# Altium PCB doorCard.PcbDoc
Units mm, origin at the board's own origin, x right, y up, seen from the top; angles counter-clockwise.
Board outline 100 x 45 mm, 2 copper layers (Top Layer, Bottom Layer); 39 components, 27 nets, 123 pads, 189 vias.
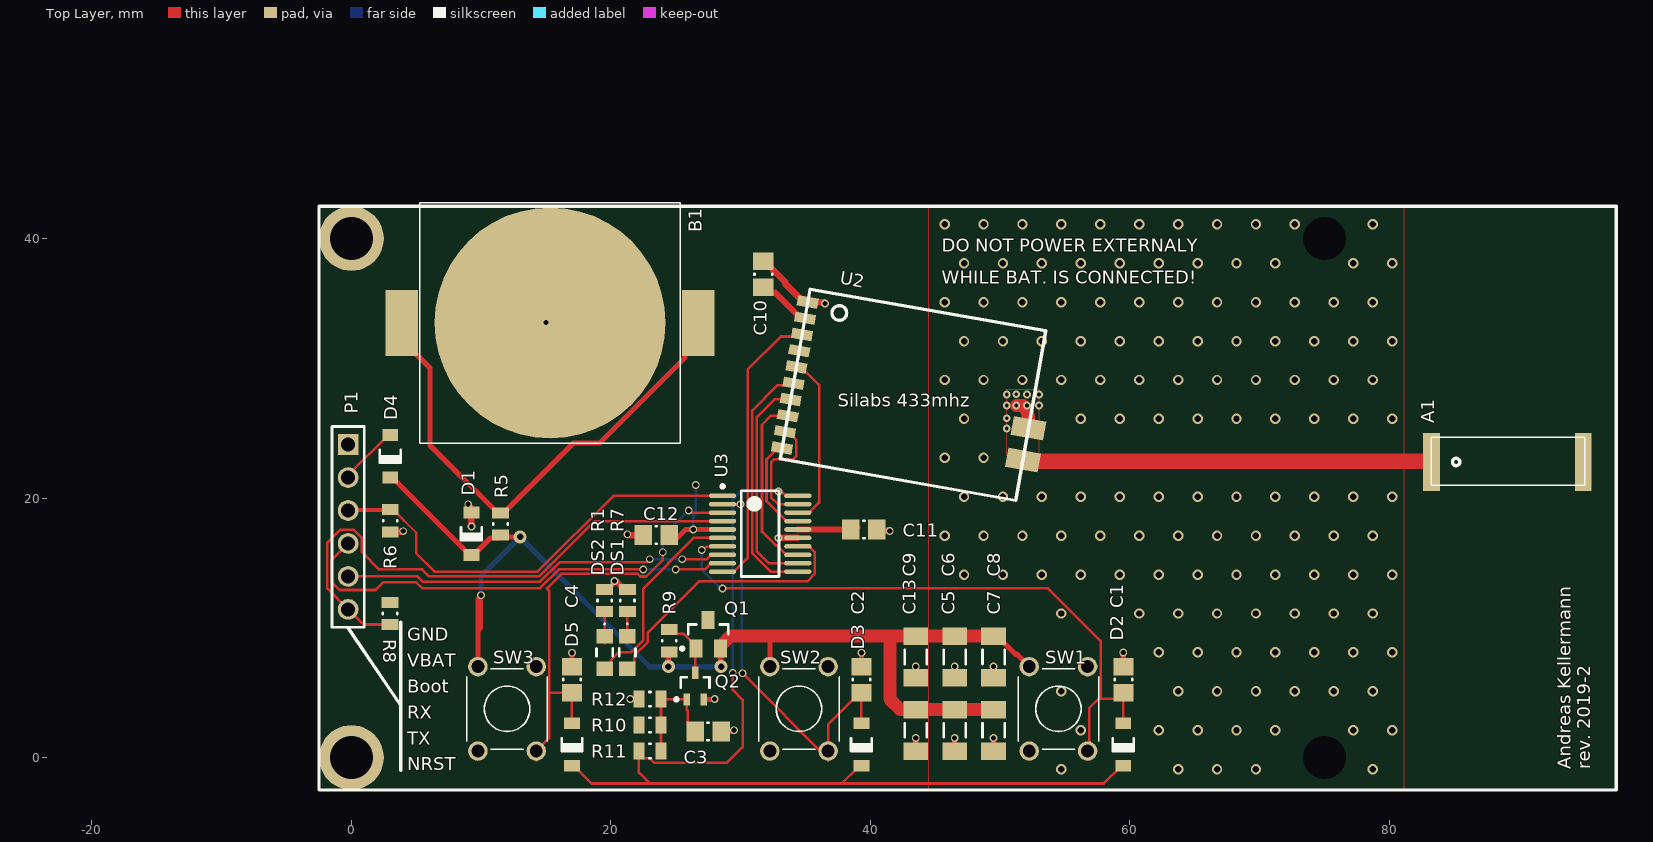
[diagram p0: Top Layer view]
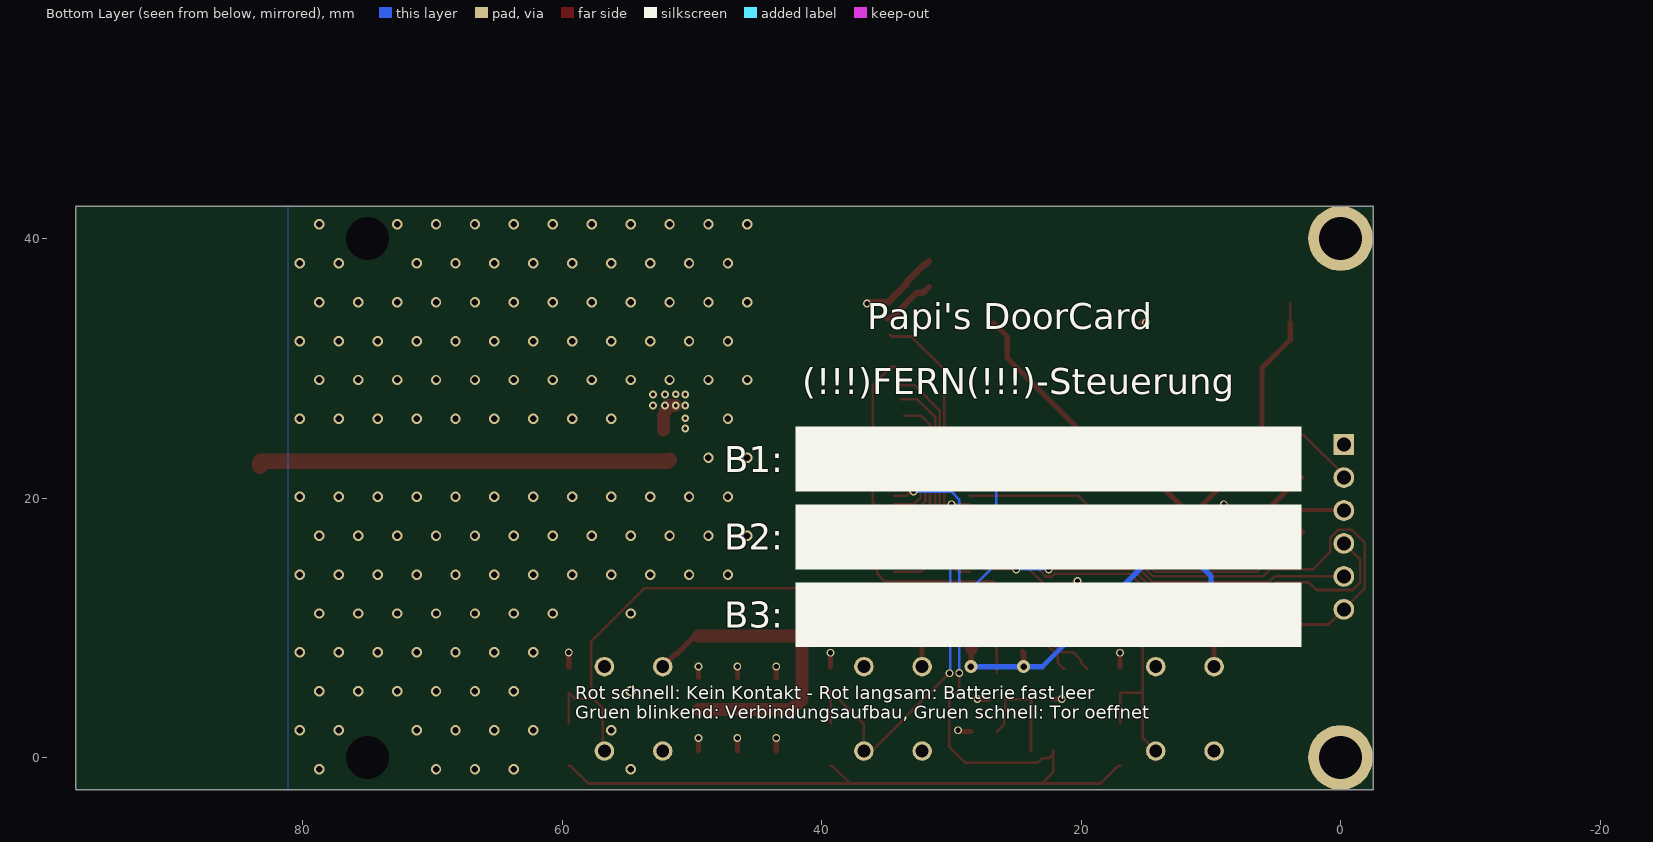
[diagram p1: Bottom Layer view, seen from below]

## Layer stack, top to bottom
Top Solder: solder mask 0.0102, Solder Resist, Dk 3.5
Top Layer: signal copper 0.0356
Dielectric 1: dielectric 0.32, FR-4, Dk 4.8
Bottom Layer: signal copper 0.0356
Bottom Solder: solder mask 0.0102, Solder Resist, Dk 3.5

## Board outline
-2.5,-2.5 -2.5,42.5 97.5,42.5 97.5,-2.5

## Design rules (kind name [scope] priority, off if disabled: settings)
Clearance [All] p1: gap=0.15 ignorepadtopadclearanceinfootprint=FALSE
PolygonConnect [All] p1: thpad.connectstyle=Relief thpad.reliefconductorwidth=0.254 thpad.reliefentries=4 thpad.polygonreliefangle="90 Angle" thpad.airgapwidth=0.2 smdpad.connectstyle=Relief smdpad.reliefconductorwidth=0.254 smdpad.reliefentries=4 smdpad.polygonreliefangle="90 Angle" smdpad.airgapwidth=0.15 via.connectstyle=Direct via.reliefconductorwidth=0.254 via.reliefentries=4 via.polygonreliefangle="90 Angle" via.airgapwidth=0.254
RoomDefinition DoorCard [InComponentClass('DoorCard')] p1: confinementstyle=ConfineIn formatcopy=TRUE lockcomponents=FALSE outline -71.25,-22.75 -20.45,-22.75 -20.45,2.65 -71.25,2.65
RoutingVias [All] p1: holewidth=0.4 width=0.6 viastyle="Through Hole" minholewidth=0.4 minwidth=0.6 maxholewidth=1 maxwidth=2
SolderMaskExpansion [All] p1: expansion=0.102
Width [All] p1: maxlimit=10 minlimit=0.15 preferedwidth=0.254
30 further rules are at their usual default settings.

## Components (designator, comment, footprint, x,y, rotation, side; value= is the part's Value field where it differs from the comment)
A1 "ANT" 433MHz_Antenna 83.25,22.78 r0 top
B1 "CR2016" CR2012 15.316,33.5 r180 top
C1 "1uF" CAPC0805(2012)100_M 59.5,6 r270 top
C2 "1uF" CAPC0805(2012)100_M 39.312,6 r270 top
C3 "1uF" CAPC0805(2012)100_M 27.5,2 r180 top
C4 "1uF" CAPC0805(2012)100_M 17,6 r270 top
C5 "CAP 47uF 6.3V 1206(3216)" CAPC1206(3216)190_M 46.5,2.1 r90 top value=47uF
C6 "CAP 47uF 6.3V 1206(3216)" CAPC1206(3216)190_M 46.5,7.76 r90 top value=47uF
C7 "CAP 47uF 6.3V 1206(3216)" CAPC1206(3216)190_M 49.5,2.1 r90 top value=47uF
C8 "CAP 47uF 6.3V 1206(3216)" CAPC1206(3216)190_M 49.5,7.76 r90 top value=47uF
C9 "CAP 47uF 6.3V 1206(3216)" CAPC1206(3216)190_M 43.5,7.76 r90 top value=47uF
C10 "1uF" CAPC0805(2012)100_M 31.75,37.25 r270 top
C11 "1uF" CAPC0805(2012)100_M 39.5,17.575 r180 top
C12 "1uF" CAPC0805(2012)100_M 23.5,17.15 r0 top
C13 "CAP 47uF 6.3V 1206(3216)" CAPC1206(3216)190_M 43.5,2.1 r90 top value=47uF
D1 "MMSD4148T3G" ONSC-SOD123-2-425G-04_V 9.25,17.25 r90 top
D2 "MMSD4148T3G" ONSC-SOD123-2-425G-04_V 59.5,1 r90 top
D3 "MMSD4148T3G" ONSC-SOD123-2-425G-04_V 39.312,1 r90 top
D4 "MMSD4148T3G" ONSC-SOD123-2-425G-04_V 3,23.227 r90 top
D5 "MMSD4148T3G" ONSC-SOD123-2-425G-04_V 17,1 r90 top
DS1 "LTST-C170YKT" LTST-C170YKT_V 19.521,8.1 r90 top
DS2 "LTST-C170YKT" LTST-C170YKT_V 21.271,8.1 r90 top
P1 "PHT-106-01-L-S" SMTC-PHT-106-01-X-S -0.25,24.12 r270 top
Q1 "DMG2305UX-13" FAIR-SOT23-3_V 27.5,9.5 r90 top
Q2 "BC847BW" INF-SOT323_N 26.5,5.5 r90 top
R1 "10k" RESC0805(2012)_L 19.521,12.1 r270 top value="10200.00 Ohm"
R5 "FUSE" RESC0805(2012)_L 11.5,18 r90 top value="10200.00 Ohm"
R6 "10k" RESC0805(2012)_L 3,18.25 r90 top value="10200.00 Ohm"
R7 "10k" RESC0805(2012)_L 21.271,12.1 r270 top value="10200.00 Ohm"
R8 "10k" RESC0805(2012)_L 2.97,11.1 r90 top value="10200.00 Ohm"
R9 "10k" RESC0805(2012)_L 24.5,9 r270 top value="10200.00 Ohm"
R10 "47k" RESC0805(2012)_L 23.015,2.5 r180 top value="10200.00 Ohm"
R11 "220" RESC0805(2012)_L 23.015,0.5 r180 top value="10200.00 Ohm"
R12 "22k" RESC0805(2012)_L 23.015,4.5 r0 top value="10200.00 Ohm"
SW1 "430156070736" 430156070736 54.5,3.75 r90 top
SW2 "430156070736" 430156070736 34.5,3.75 r90 top
SW3 "430156070736" 430156070736 12,3.75 r90 top
U2 "Si4463" E10-433MS 33.195,23.849 r350 top locked
U3 "STM32F070F6P6" STM-TSSOP20_M 31.51,17.25 r0 top locked

## Footprints (in the part's own frame and the unit in brackets; to place one, negate y for a bottom-side part, rotate by r counter-clockwise, add the part's x,y. Pads: shape width x height; smd on the part's side, far side on the other; paste and mask are expansions set on the pad)
433MHz_Antenna [mm] "ANT1204F002R0433A"
  rect 1.3x4.5 smd: 1(0,0) 2(11.7,0)
  silkscreen extent 0,-1.78 11.81,1.91
430156070736 [mm] "6*6mm vertical type, THT, height 7.0mm, salmon actuator, 360gf, Bulk"
  round 1.5 hole 1: 1(-3.25,2.25) 2(-3.25,-2.25) 3(3.25,2.25) 4(3.25,-2.25)
  silkscreen extent -3.1,-3.1 3.1,3.1, body extent -3.95,-3.1 3.95,3.1, height 7.01
CAPC0805(2012)100_M [mm] "Chip Capacitor, Body 2.0x1.2mm, Height 1.0mm, IPC Low Density"
  rect 1.35x1.55 smd: 1(-1,0) 2(1,0)
  silkscreen extent -0.05,-0.67 0.05,0.67, body extent -1.1,-0.72 1.1,0.72, height 1
CAPC1206(3216)190_M [mm] "Chip Capacitor, Body 3.2x1.6mm, Height 1.9mm, IPC Low Density"
  rect 1.35x1.9 smd: 1(-1.6,0) 2(1.6,0)
  silkscreen extent -0.55,-0.85 0.55,0.85, body extent -1.7,-0.9 1.7,0.9, height 1.9
CR2012 [mm] "BAT-HLD-002-SMT"
  rect 2.5x5.1 smd: 1(-11.43,0) 1(11.43,0)
  round 17.8 smd paste-17.8: 2(0,0)
  silkscreen extent -10.03,-9.27 10.03,9.27
E10-433MS [mm] "Si4463"
  rect 1.6x0.8 smd: 1(0,11.43) 2(0,10.16) 3(0,8.89) 4(0,7.62) 5(0,6.35) 6(0,5.08) 7(0,3.81) 8(0,2.54) 9(0,1.27) 10(0,0)
  rect 2.54x1.5 smd: 11(18.45,2.31) 12(18.45,4.8)
  silkscreen extent 0,-0.84 18.45,12.43
FAIR-SOT23-3_V [mm] "SOT23, 3-Leads, Body 3.12x1.5mm, Pitch 0.95mm"
  rect 1.4x1 smd: 1(-1.1,0.95) 2(-1.1,-0.95) 3(1.1,0)
  silkscreen extent -1.22,-1.55 0.75,2.12, body extent -1.35,-1.56 1.35,1.56, height 1.2
INF-SOT323_N [mm] "SOT23, 3-Leads, Body 2x1.25 mm, Pitch 0.65 mm, IPC Medium Density"
  rect 0.95x0.5 smd: 1(-1.025,0.65) 2(-1.025,-0.65) 3(1.025,0)
  silkscreen extent -1.15,-1.1 0.67,1.57, body extent -0.67,-1.1 0.67,1.1, height 1
LTST-C170YKT_V [mm]
  rect 1.1x1.25 smd: A(-1.25,0) C(1.25,0)
  silkscreen extent -0.3,-0.63 2.25,0.63, body extent -1,-0.63 1,0.63, height 1.1
ONSC-SOD123-2-425G-04_V [mm] "SOD123, 2-Leads, Body 2.69x1.6mm, Height 1.35mm"
  rect 0.915x1.22 smd: 1(-1.637,0) 2(1.637,0)
  silkscreen extent -0.5,-0.8 0.5,0.8, body extent -1.35,-0.8 1.35,0.8, height 1.35
RESC0805(2012)_L [mm] "Chip Resistor, Body 2.0x1.3mm, IPC High Density"
  rect 0.85x1.3 smd: 1(-0.85,0) 2(0.85,0)
  silkscreen extent -0.05,-0.55 0.05,0.55, body extent -1.1,-0.67 1.1,0.68, height 0.7
SMTC-PHT-106-01-X-S [mm] "Press Fit Socket Assembly, 1x6 Pins, Vertical, 2.54mm Pitch, Male"
  rect 1.6x1.6 hole 1.081: 1(0,0)
  round 1.6 hole 1.081: 2(2.54,0) 3(5.08,0) 4(7.62,0) 5(10.16,0) 6(12.7,0)
  silkscreen extent -1.4,-1.24 14.1,1.24, body extent -1.26,-1.25 13.96,1.25, height 8.38
STM-TSSOP20_M [mm] "SOP, 20-Leads, Body 6.6x4.5mm, Pitch 0.65mm, IPC Low Density"
  oval 2.1x0.35 smd: 1(-2.9,2.925) 2(-2.9,2.275) 3(-2.9,1.625) 4(-2.9,0.975) 5(-2.9,0.325) 6(-2.9,-0.325) 7(-2.9,-0.975) 8(-2.9,-1.625) 9(-2.9,-2.275) 10(-2.9,-2.925) 11(2.9,-2.925) 12(2.9,-2.275) 13(2.9,-1.625) 14(2.9,-0.975) 15(2.9,-0.325) 16(2.9,0.325) 17(2.9,0.975) 18(2.9,1.625) 19(2.9,2.275) 20(2.9,2.925)
  silkscreen extent -3.02,-3.3 1.45,3.77, body extent -2.25,-3.3 2.25,3.3, height 1.2

## Part data
A1: library part ANT1204F002R0433A, "ANT1204F002R0433A"
B1: library part BAT-HLD-002-SMT, "BAT-HLD-002-SMT"
C1 C2 C3 C4 C10 C11 C12: library part CMP-1036-04754-1, "CAP 1uF 25V ±10% 0805 (2012 Metric) Thickness 1mm SMD", Case-EIA=0805, Case-Metric=2012, Rated Voltage="25 V", Tolerance=±10%, Max Thickness="1 mm", Technology=SMT
C5 C6 C7 C8 C9 C13: library part CMP-1037-05000-1, "CAP 47uF 6.3V ±20% 1206 (3216 Metric) Thickness 1.9mm SMD", Case-EIA=1206, Case-Metric=3216, Rated Voltage="6.3 V", Tolerance=±20%, Max Thickness="1.9 mm", Technology=SMT
D1 D2 D3 D4 D5: library part CMP-0895-00002-1, "Switching Diode, 100 V, 200 mA, -55 to 150 degC, 2-Pin SOD123 (425), RoHS, Tape and Reel", Manufacturer="ON Semiconductor", Temperature Range="-55 to 150 degC", CD (Max)="4 pF", ComponentLink1Description="Manufacturer URL", ComponentLink1URL=http://www.onsemi.com/, ComponentLink2Description=Datasheet, ComponentLink2URL=http://www.onsemi.com/pub_link/Collateral/MMSD4148T1-D.PDF, ComponentLink3Description="Package Specification", ComponentLink3URL=http://www.onsemi.com/pub_link/Collateral/425-04.PDF, DatasheetVersion="Rev. 11", IR @ VR="75 V (Max)=50 uA", Mounting Technology="Surface Mount", PackageDescription="2-Pin SOD123, Body 2.69 x 1.6 mm, Height 1.35 mm", PackageReference=SOD123-2-425G-04, PackageVersion="Rev. 04G", Packing="Tape and Reel", PartNumber=MMSD4148T3G, PD (Max)="425 mW", RoHS=TRUE, Trr (Max)="4 ns", VBR (Min)="100 V", VF (Max)="1 A"
DS1 DS2: library part CMP-1674-00003-2, "LED YELLOW CLEAR 0805 SMD", ComponentLink1Description=Datasheet, ComponentLink1URL="http://media.digikey.com/pdf/Data Sheets/Lite-On PDFs/LTST-C170YKT.pdf", PackageReference=C170YKT, PartNumber=LTST-C170YKT
P1: library part CMP-1024-00187-1, "Press Fit Header, Through-hole, Vertical, -55 to 125 degC, 2.54 mm Pitch, 6-Pin, Male, RoHS", Manufacturer=Samtec, Temperature Range="-55 to 125 degC", ComponentLink1Description="Manufacturer URL", ComponentLink1URL=http://www.samtec.com, ComponentLink2Description=Datasheet, ComponentLink2URL=http://www.samtec.com/documents/webfiles/pdf/pht.pdf, ComponentLink3Description="Package Specification", ComponentLink3URL=http://www.samtec.com/documents/webfiles/cpdf/PHT-1XX-XX-X-X-XXX-MKT.pdf, DatasheetVersion=F-214, Mounting Technology=Through-hole, Orientation=Vertical, PackageDescription=".100 Press Fit Socket Assembly", PackageReference=PHT-106-01-X-S, PackageVersion="J, 9/2009", PartNumber=PHT-106-01-L-S, Pitch="2.54 mm", RoHS=True
Q1: library part CMP-1670-00012-1, Capacitance="1.8E-11 f", Frequency="8 MHz", Frequency Tolerance=30ppm, Load Capacitance="18 pF", Max Operating Temperature=70degC, Min Operating Temperature=-20degC, Package Quantity=1000, Resistance="100 Ohm", ComponentLink1Description="Manufacturer URL", ComponentLink1URL=https://www.fairchildsemi.com/, ComponentLink2Description=Datasheet, ComponentLink2URL=https://www.fairchildsemi.com/datasheets/BS/BSS84.pdf, ComponentLink3Description="Package Specification", ComponentLink3URL=http://www.fairchildsemi.com/dwg/MA/MA03D.pdf, DatasheetVersion="Rev. 1.1.0, 02/2013", ESR="100 Ohm", Height="1.2 mm", Length="5 mm", Mount="Surface Mount", PackageDescription="3-Pin Small Outline Transistor, Body 2.92 x 1.325 mm, Pitch 0.95 mm", PackageReference=SOT23-3, Packaging="Tape and Reel", Pins=4, REACH SVHC=Unknown, RoHSCompliant=True, Tolerance=30ppm, Width="3.2 mm"
Q2: library part CMP-1177-00080-1, "NPN Silicon AF Transistor, 45 V VCEO, 100 mA IC, SOT323, Reel, Green", Manufacturer=Infineon, ComponentLink1Description="Manufacturer URL", ComponentLink1URL=http://www.infineon.com/, ComponentLink2Description=Datasheet, ComponentLink2URL=http://www.infineon.com/dgdl/bc847series_bc848series_bc849series_bc850series.pdf?folderId=db3a304314dca389011541d30fa21656&fileId=db3a304314dca389011541d4630a1657, ComponentLink3Description="Package Specification", ComponentLink3URL=http://www.infineon.com/dgdl/SOT323-Package_Overview.pdf?folderId=db3a30431936bc4b0119533e1dcb3c92&fileId=db3a30431936bc4b011953495f283cb1, fT (typ)="250 MHz", Green=TRUE, Halogen-free=TRUE, IBM (max)="200 mA", IC (max)="100 mA", ICBO (max)="15 nA", ICM (max)="200 mA", Mounting Technology="Surface Mount", PackageDescription="3-Pin Small Outline Transistor Package, 1.25 x 2 mm Body, 0.65 mm Pitch", PackageReference=SOT323, Packing=Reel, PartNumber=BC847BW, Polarity=NPN, Ptot (max)="250 mW", VCBO (max)="50 V", VCEO (max)="45 V", VEBO (max)="6 V"
R1 R6 R7 R8 R9 R10 R11 R12: library part CMP-1013-00624-1, "10K2 0.125W 1% 0805 (2012 Metric)  SMD", Case-EIA=0805, Case-Metric=2012, Power="0.125 W", Tolerance="1 %", Technology=SMT
R5: library part CMP-1013-00624-1, "PTC Fuse", Case-EIA=0805, Case-Metric=2012, Power="0.125 W", Tolerance="1 %", Technology=SMT
SW1 SW2 SW3: library part CMP-1453-00006-1, "WS-TATV THT Tact Switch 6X6 mm", Manufacturer="Wuerth Elektronik", ComponentLink1Description="Manufacturer URL", ComponentLink1URL=http://www.we-online.com, ComponentLink2Description=Datasheet, ComponentLink2URL=http://katalog.we-online.de/em/datasheet/4301x6.pdf, NoPins=04, PackageReference=430156070736, PartNumber=430156070736
U2: library part Component_1, "E10-433MS"
U3: library part CMP-0304-00145-2, "ARM Cortex-M0 32-bit MCU, 32 KB Flash, 6 KB Internal RAM, 15 I/Os, 20-Pin TSSOP, -40 to 85 degC, Tray", I/Os (High Current)=15, Manufacturer=STMicroelectronics, Operating Frequency(F) (Processor speed) (MHz)=48, Package Description="20-Pin Thin Shrink Small Outline Package, Body 6.5 x 4.4 mm, Pitch 0.65 mm", Package Reference=TSSOP20, Supply Voltage(Vcc) min (V)=2.4, ComponentLink1Description="Manufacturer URL", ComponentLink1URL=http://www.st.com/, ComponentLink2Description=Datasheet, ComponentLink2URL=http://www.st.com/st-web-ui/static/active/en/resource/technical/document/datasheet/DM00141386.pdf, Core="ARM Cortex-M0", DatasheetVersion="Rev. 3", FLASH Size (Prog) (kB)=32, Internal RAM Size (kB)=6, Mounting Technology="Surface Mount", Packing=Tray, PartNumber=STM32F070F6P6

## Free pads (board coordinates)
  round 5 hole 3.3: 1(0,0) 5(0,40)
  round 1 hole 3.3: 4(75,0) 6(75,40)

## Via types
v1: diameter 0.8, hole 0.5, Top Layer to Bottom Layer, tented both sides, 140 vias
v2: diameter 0.6, hole 0.4, Top Layer to Bottom Layer, tented both sides, 36 vias
v3: diameter 0.6, hole 0.3, Top Layer to Bottom Layer, tented both sides, 10 vias
v4: diameter 1, hole 0.5, Top Layer to Bottom Layer, tented both sides, 3 vias

## Nets (pads, with @x,y where several pads share a name; then routed paths per layer and width w, separated by ;. In a path a pad name is that pad's centre, name@x,y a point inside that pad or via, vN(x,y) a via of type N, cw(c..) or ccw(c..) an arc to the next point about the centre after c; other vN are vias at no path point)
ANT: A1.1 U2.11 | length 31.9
  Top Layer w1.2: U2.11 51.856,22.83 A1.1@83.25,22.83 ; A1.1 83.3,22.73 A1.1@83.3,22.45
BOOT0: P1.3 R6.2 U3.1 | length 34.2
  Top Layer w0.2: R6.2@2.97,19.07 3.255,19.07 5,17.325 5,15.739 6.429,14.31 14.325,14.31 20.19,20.175 U3.1
  Top Layer w0.3: P1.3 -0.22,19.07 R6.2@2.97,19.07
GND: B1.2 C1.1 C2.1 C3.1 C4.1 C5.1 C6.1 C7.1 C8.1 C9.1 C10.1 C11.1 C12.1 C13.1 D1.2 P1.1 pad.1 pad.5 Q2.2 R1.1 R6.1 R7.1 R12.1 U2.1 U2.12 U3.15 | length 29.3
  Top Layer w0.4: v2(9,19.525) 9.25,19.275 D1.2 ; C4.1 v2(17,8.079) ; R1.1 19.746,12.95 20.233,13.437 20.233,13.535 v2@20.271,13.573 ; v2(21.5,4.5) R12.1 ; Q2.2 27.975,4.475 v2(28,4.5) ; C3.1 29.4,2 v2(29.5,2.1) ; C2.1 v2(39.312,8.079) ; C13.1 v2(43.5,1.5) ; C9.1 v2(43.5,7.025) ; C5.1 v2(46.5,1.5) ; C6.1 v2(46.5,7.025) ; C7.1 v2(49.5,1.5) ; C8.1 v2(49.5,7.025) ; C1.1 v2(59.5,8.1)
  Top Layer w0.5: R6.1 3.952,17.4 v2(4,17.448) ; v2(9.25,17.805) D1.2 ; v2(14.996,33.54) 15.316,33.54 B1.2 ; v2@20.415,13.581 21.046,12.95 R7.1 ; v2(21.271,17.216) 21.337,17.15 C12.1 ; C10.1 32,38 32.1,38 33.424,36.676 33.424,36.537 34.855,35.106 36.5,35.106 v2(36.5,35) ; v2(32.919,16.925) U3.15 ; C11.1 40.611,17.464 v2(41.5,17.464)
  Top Layer w1: v3(51.25,27.131) 51.75,27.131 cw(c50.669,26.05) 52.198,26.05 U2.12 U2.12@52.198,25.259
  other v1: 54.725,-0.9 63.725,-0.9 66.725,-0.9 69.725,-0.9 78.725,-0.9 56.225,2.1 62.225,2.1 65.225,2.1 68.225,2.1 71.225,2.1 77.225,2.1 80.225,2.1 54.725,5.1 63.725,5.1 66.725,5.1 69.725,5.1 72.725,5.1 75.725,5.1 78.725,5.1 62.225,8.1 65.225,8.1 68.225,8.1 71.225,8.1 74.225,8.1 77.225,8.1 80.225,8.1 54.725,11.1 60.725,11.1 63.725,11.1 66.725,11.1 69.725,11.1 72.725,11.1 75.725,11.1 78.725,11.1 47.225,14.1 50.225,14.1 53.225,14.1 56.225,14.1 59.225,14.1 62.225,14.1 65.225,14.1 68.225,14.1 71.225,14.1 74.225,14.1 77.225,14.1 80.225,14.1 45.725,17.1 48.725,17.1 51.725,17.1 54.725,17.1 57.725,17.1 60.725,17.1 63.725,17.1 66.725,17.1 69.725,17.1 72.725,17.1 75.725,17.1 78.725,17.1 47.225,20.1 50.225,20.1 53.225,20.1 56.225,20.1 59.225,20.1 62.225,20.1 65.225,20.1 68.225,20.1 71.225,20.1 74.225,20.1 77.225,20.1 80.225,20.1 45.725,23.1 48.725,23.1 47.225,26.1 56.225,26.1 59.225,26.1 62.225,26.1 65.225,26.1 68.225,26.1 71.225,26.1 74.225,26.1 77.225,26.1 80.225,26.1 45.725,29.1 48.725,29.1 51.725,29.1 54.725,29.1 57.725,29.1 60.725,29.1 63.725,29.1 66.725,29.1 69.725,29.1 72.725,29.1 75.725,29.1 78.725,29.1 47.225,32.1 50.225,32.1 53.225,32.1 56.225,32.1 59.225,32.1 62.225,32.1 65.225,32.1 68.225,32.1 71.225,32.1 74.225,32.1 77.225,32.1 80.225,32.1 45.725,35.1 48.725,35.1 51.725,35.1 54.725,35.1 57.725,35.1 60.725,35.1 63.725,35.1 66.725,35.1 69.725,35.1 72.725,35.1 75.725,35.1 78.725,35.1 47.225,38.1 50.225,38.1 53.225,38.1 56.225,38.1 59.225,38.1 62.225,38.1 65.225,38.1 68.225,38.1 71.225,38.1 77.225,38.1 80.225,38.1 45.725,41.1 48.725,41.1 51.725,41.1 54.725,41.1 57.725,41.1 60.725,41.1 63.725,41.1 66.725,41.1 69.725,41.1 72.725,41.1 78.725,41.1
  other v2: 20.271,13.6
  other v3: 50.514,25.351 50.514,26.15 50.514,27.131 52.073,27.131 53,27.131 50.514,27.971 52.073,27.971 53,27.971 51.25,28
GPIO0: U2.3 U3.10 | length 22.2
  Top Layer w0.2: U3.10 29.485,14.325 30.55,15.39 30.55,29.9 33.099,32.449 34.583,32.449 U2.3
IRQ: U2.5 U3.18 | length 13.4
  Top Layer w0.2: U2.5 34.675,30.103 36.05,28.728 36.05,19.64 35.285,18.875 U3.18
LED_GREEN: DS2.A U3.14 | length 21.4
  Top Layer w0.2: DS2.A 21.346,6.85 21.796,7.3 21.796,7.851 22.85,8.905 22.85,9.629 26.803,13.582 35.143,13.582 35.71,14.149 35.71,15.85 35.285,16.275 U3.14
LED_RED: DS1.A U3.6 | length 15.7
  Top Layer w0.2: DS1.A 19.55,6.85 20,7.3 20,7.5 20.6,8.1 21.55,8.1 22.5,9.05 22.5,13.017 24.429,14.946 24.429,14.996 26.357,16.925 U3.6
MISO: U2.7 U3.12 | length 17.1
  Top Layer w0.2: U2.7 32.602,27.602 31.25,26.25 31.25,15.88 32.155,14.975 U3.12
MOSI: U2.8 U3.13 | length 14
  Top Layer w0.2: U2.8 32.351,26.351 31.65,25.65 31.65,17.416 32.691,16.375 32.785,16.375 33.535,15.625 U3.13
NetB1_1: B1.1 R5.2 | length 41.7
  Top Layer w0.2: B1.1@3.886,33.5 B1.1@3.886,35.01
  Top Layer w0.4: B1.1@3.886,33.5 3.886,32.2 6.066,30.02 6.066,24.059 11.275,18.85 R5.2 11.725,18.85 17.125,24.25 19.147,24.25 25.696,30.799 25.696,32.45 B1.1@26.746,33.5
NetC3_2: C3.2 Q2.1 R10.1 R11.1 R12.2 | length 8.7
  Top Layer w0.2: R11.1 R10.1 R12.2 25.825,4.5 Q2.1 25.85,3.7 25.925,3.625 25.925,2.575 C3.2
NetD4_2: D4.2 P1.2 | length 4.7
  Top Layer w0.2: P1.2 -0.25,21.767 2.847,24.865 D4.2
NetDS1_C: DS1.C R1.2 | length 2.4
  Top Layer w0.2: DS1.C@19.521,8.825 R1.2
NetDS2_C: DS2.C R7.2 | length 2.4
  Top Layer w0.2: DS2.C@21.271,8.825 R7.2
NetQ1_1: Q1.1 Q2.3 R9.1 | length 4.7
  Top Layer w0.2: R9.1 24.825,9.525 25.625,9.525 26.55,8.6 Q1.1 26.5,8.35 Q2.3
NRST: P1.6 R8.1 U3.4 | length 44.3
  Top Layer w0.2: R8.1 0.92,10.25 P1.6 -1.85,13.02 -1.85,16.56 -0.86,17.55 0.185,17.55 0.8,16.935 0.8,15.825 2.125,14.5 5.46,14.5 6,13.96 14.47,13.96 18.735,18.225 U3.4
nSEL: U2.9 U3.19 | length 9.5
  Top Layer w0.2: U2.9 33.659,25.1 34.302,24.457 34.302,23.225 34.077,23 32.617,23 32.35,22.733 32.35,20.045 32.87,19.525 U3.19
RX: P1.4 U3.9 | length 35.1
  Top Layer w0.2: P1.4 -1.5,15.25 -1.5,13.5 -0.91,12.91 1.863,12.91 2.453,13.5 5,13.5 5.45,13.05 14.55,13.05 16,14.5 v2(22.5,14.5) ; v2(25,14.5) 27.26,14.5 27.735,14.975 U3.9
  Bottom Layer w0.2: v2(22.5,14.5) v2(25,14.5)
SCK: U2.6 U3.11 | length 19.2
  Top Layer w0.2: U2.6 33.922,28.697 32.847,28.697 30.9,26.75 30.9,15.735 32.31,14.325 U3.11
SDN: U2.10 U3.17 | length 7.8
  Top Layer w0.2: U2.10 32.87,23.849 32,22.979 32,19.76 33.535,18.225 U3.17
SW1: C1.2 D2.2 SW1.2 U3.7 | length 50.2
  Top Layer w0.2: v2(27,16) 27.108,16 27.355,16.246 28.581,16.246 U3.7 ; v2(28.61,13.032) 53.713,13.032 57.75,8.994 57.75,4.704 57.572,4.525 ; SW1.2@56.875,-0.125 56.875,3.829 57.572,4.525 ; D2.2 59.5,4.9 C1.2@59.45,4.95 ; C1.2 C1.2@59.45,4.95 ; 57.572,4.525 59.025,4.525 C1.2@59.45,4.95
  Bottom Layer w0.2: v2(27,16) 27,14.5 v2@28.539,12.961
SW2: C2.2 D3.2 SW2.2 U3.2 | length 32.5
  Top Layer w0.2: U3.2 v2(30,19.525) ; v2(30.152,6.5) SW2.2@36.75,-0.098 ; SW2.2@36.75,-0.25 SW2.2@36.75,-0.098 ; C2.2@39.212,5 36.75,2.538 SW2.2@36.75,-0.098 ; D3.2 C2.2
  Top Layer w0.4: C2.2@39.212,5 C2.2
  Bottom Layer w0.2: v2(30,19.525) 30.076,19.449 30.076,6.576 v2(30.152,6.5)
SW3: C4.2 D5.2 SW3.2 U3.3 | length 35.2
  Top Layer w0.2: SW3.2@14.25,-0.25 SW3.2 15.25,1.5 15.25,5 ; D5.2 C4.2 15.25,5 ; v2(24,15.825) 24,15.222 22.728,13.95 22.272,13.95 22.072,14.15 16.19,14.15 15.072,13.032 15.25,12.853 15.25,5 ; v2(26,19.04) 26.108,19.04 26.273,18.875 U3.3
  Bottom Layer w0.2: v2(24,15.825) 24,17.04 v2(26,19.04)
TX: P1.5 U3.8 | length 29.9
  Top Layer w0.2: P1.5 5.09,13.96 5.5,13.55 14.555,13.55 16.055,15.05 22.76,15.05 v2(23,15.29) ; v2(25.5,15.29) 27.398,15.29 27.733,15.625 U3.8
  Bottom Layer w0.2: v2(23,15.29) 23.015,15.275 25.485,15.275 v2(25.5,15.29)
VCC: C10.2 C11.2 C12.2 Q1.3 R8.2 R10.2 U2.2 U3.5 U3.16 | length 16.4
  Top Layer w0.2: v2(26.357,17.575) v2@26.5,17.575
  Top Layer w0.4: C12.2@24.924,16.726 25.774,17.575 v2(26.357,17.575) ; v2@26.5,17.575 U3.5
  Top Layer w0.5: C10.2 32.175,35.825 32.665,35.825 34.635,33.855 U2.2 ; U3.16 38.825,17.575 C11.2@39,17.75
  Bottom Layer w0.2: v2(26.357,17.575) 26.357,18.619 26.55,18.812 v2(26.55,21)
VCC_P: C5.2 C6.2 C7.2 C8.2 C9.2 C13.2 D1.1 D4.1 Q1.2 R5.1 R9.2 SW1.3 SW2.3 SW3.3 | length 89.7
  Top Layer w0.4: D4.1 3.153,21.59 8.84,15.902 8.84,15.87 9.097,15.612 D1.1 9.403,15.612 10.715,16.925 11.275,16.925 R5.1 11.65,17 v4(13,17) ; SW3.3 9.75,9.788 ; v4(24.429,7) 24.429,8.079 R9.2 ; Q1.2 28.475,8.375 28.475,7.025 v4(28.5,7) ; 32.26,7.76 32.26,9.36 ; C8.2 49.775,9.36 51.18,7.955 51.295,7.955 SW1.3 ; 9.75,9.788 9.75,12.196 v2@9.962,12.408 ; 9.75,9.788 9.962,10 v2@9.962,12.408 ; v2@9.962,12.408 9.962,12.462 v2(10,12.5) 10,12.446 v2@9.962,12.408
  Top Layer w1: Q1.2 28.45,8.6 29.21,9.36 32.26,9.36 41.5,9.36 ; C7.2 C5.2 C13.2 42.3,3.7 41.5,4.5 41.5,9.36 ; C8.2 C6.2 C9.2 41.5,9.36
  Bottom Layer w0.4: v2(10,12.5) 10,14 v4(13,17) 23,7 v4(24.429,7) v4(28.5,7)
wake: D2.1 D3.1 D5.1 R11.2 U3.20 | length 82.1
  Top Layer w0.2: D5.1 17.153,-0.637 18.515,-2 23,-2 ; R11.2 R11.2@22.165,0.275 ; v2(29.4,6.525) 29.4,5.2 30.152,4.448 30.152,0.8 28.952,-0.4 23.336,-0.4 22.986,-0.05 22.49,-0.05 R11.2@22.165,0.275 ; v2(32.919,20.5) 32.996,20.423 33.246,20.423 33.494,20.175 U3.20 ; D3.1 39.16,-0.637 37.797,-2 ; D2.1 59.347,-0.637 57.985,-2 37.797,-2 ; R11.2@22.165,0.275 22.165,-1.165 23,-2 ; 23,-2 37.797,-2
  Bottom Layer w0.2: v2(29.4,6.525) 29.4,19.9 30,20.5 v2(32.919,20.5)
pads on no net: A1.2 SW1.1 SW1.4 SW2.1 SW2.4 SW3.1 SW3.4 U2.4

## Polygon pours and split planes (outlines as drawn)
GND on Top Layer "Top Layer-GND 1" (solid, remove dead copper, shelved, pour order 12): 44.5,42.5 81.125,42.5 81.125,-2.5 44.5,-2.5 44.5,0.8 44.5,3.775
VCC on Top Layer "Top Layer-VCC" (solid, shelved, pour order 8): 44.5,-2.5 44.5,42.5 -2.5,42.5 -2.5,-2.5
GND on Top Layer "Top Layer-GND" (solid, shelved, pour order 10): 50.514,23.274 50.514,28.392 53,28.392 53,23.274
GND on Bottom Layer "Bottom Layer-GND" (solid, shelved, pour order 6): 81.125,42.5 -2.5,42.5 -2.5,-2.5 81.125,-2.5

## Other copper
Top Layer:
  pour cut-out: -21.25,54.25

## Silkscreen, mask and mechanical layers (free items; w line width, h text height)
Top Overlay:
  lines w0.254: -0.25,10 3.8,4 3.8,10.45 3.8,-1 ; -2.5,-2.5 97.5,-2.5 97.5,42.5 -2.5,42.5 -2.5,-2.5
  text "DO NOT POWER EXTERNALY" at 45.5,39 h1
  text "WHILE BAT. IS CONNECTED!" at 45.5,36.5 h1
  text "Silabs 433mhz" at 37.475,27.025 h1
  text "GND" at 4.287,9 h1
  text "VBAT" at 4.287,7 h1
  text "Boot" at 4.287,5 h1
  text "RX" at 4.287,3 h1
  text "TX" at 4.287,1 h1
  text "Andreas Kellermann" at 94,-0.9 h1 r90
  text "rev. 2019-2" at 95.5,-0.9 h1 r90
  text "NRST" at 4.287,-1 h1
Bottom Overlay:
  rectangle: 3,8.5 42,13.5
  rectangle: 3,14.5 42,19.5
  rectangle: 3,20.5 42,25.5
  text "Papi's DoorCard" at 36.5,33 h2
  text "(!!!)FERN(!!!)-Steuerung" at 41.5,28 h2
  text "B1:" at 47.5,22 h2
  text "B2:" at 47.5,16 h2
  text "B3:" at 47.5,10 h2
  text "Rot schnell: Kein Kontakt - Rot langsam: Batterie fast leer" at 59,4.5 h1
  text "Gruen blinkend: Verbindungsaufbau, Gruen schnell: Tor oeffnet" at 59,3 h1
Mechanical 1:
  lines w0.254: 21,38 23.23,38 ccw(c23.23,39.27) 24.5,39.27 24.5,41.23 cw(c25.77,41.23) 25.77,42.5 76.23,42.5 95,42.5 96.23,42.5 cw(c96.23,41.23) 97.5,41.23 97.5,-1.23 cw(c96.23,-1.23) 96.23,-2.5 76.23,-2.5 -1.3,-2.5 cw(c-1.3,-1.3) -2.5,-1.3 -2.5,41.5 ; 23.5,38 7.77,38 cw(c7.77,39.27) 6.5,39.27 6.5,41.23 ccw(c5.23,41.23) 5.23,42.5 -1.5,42.5 ; -2.5,41.5 cw(c-1.5,41.5) -1.5,42.5 ; -2.5,41.5 cw(c-1.5,41.5) -1.5,42.5